# EAGLE board hub (EAGLE 7.1.0)
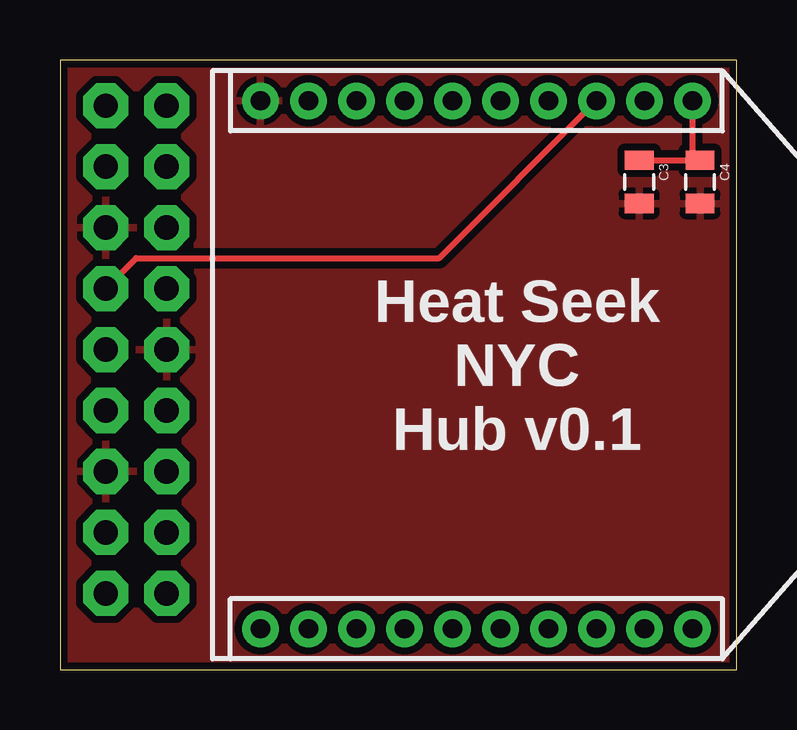
[diagram p0: board, top side]
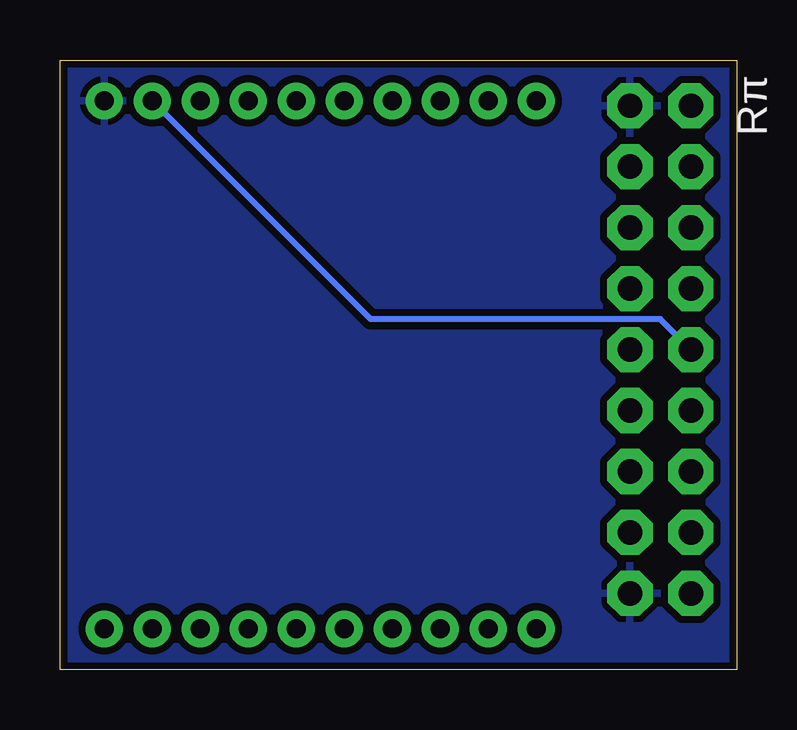
[diagram p1: board, bottom side, seen from below]

Size 28.19 x 25.4 mm. Coordinates in mm from the lower left corner, seen from the top.
Outline: 0,0 28.19,0 28.19,25.4 0,25.4 0,0
Copper layers (1*16): Top 0.035mm / dielectric 1.5mm / Bottom 0.035mm
Design rules "SparkFun-2-layer": minimum track width 7mil, minimum drill 15mil, track to track 8mil, track to pad 8mil, pad to pad 8mil, via to via 8mil, smd to smd 8mil, copper to edge 8mil, drill to drill 8mil, minimum pad ring 12mil, minimum via ring 10mil, stop-mask expansion 4mil, vias tented up to drill 20mil, thermal gap 10mil

## Footprints (pad centres in the part's own frame; a part is rotated, then mirrored left to right if it is on the bottom)
0805 = smd 0.8 x 1.2: 1 -0.9,0; 2 0.9,0
2X9_NOSILK = drill 1.016 pad 1.88 octagon: 1 -10.16,-1.27; 2 -10.16,1.27; 3 -7.62,-1.27; 4 -7.62,1.27; 5 -5.08,-1.27; 6 -5.08,1.27; 7 -2.54,-1.27; 8 -2.54,1.27; 9 0,-1.27; 10 0,1.27; 11 2.54,-1.27; 12 2.54,1.27; 13 5.08,-1.27; 14 5.08,1.27; 15 7.62,-1.27; 16 7.62,1.27; 17 10.16,-1.27; 18 10.16,1.27
XBEE-1 = drill 0.8 pad 1.524: 1 -11,20; 2 -11,18; 3 -11,16; 4 -11,14; 5 -11,12; 6 -11,10; 7 -11,8; 8 -11,6; 9 -11,4; 10 -11,2; 11 11,2; 12 11,4; 13 11,6; 14 11,8; 15 11,10; 16 11,12; 17 11,14; 18 11,16; 19 11,18; 20 11,20

## Placement (x,y rotation side)
C3  1µF  [0805]  24.13,20.32 270 top
C4  8.2pF  [0805]  26.67,20.32 270 top
FRAME1  FRAME-LETTER  [CREATIVE_COMMONS]  -6.35,36.83 0 top  (outside the outline)
Rπ  M9X2  [2X9_NOSILK]  3.17,13.34 270 bottom
XB24  XBEE-1XBEE-1  [XBEE-1]  6.35,12.7 270 top

## Library data of the parts
C3 C4 = SparkFun-Capacitors
FRAME1 = SparkFun-Aesthetics
Rπ XB24 = hrldcpr

## Nets
3.3V: C3.1 C4.1 Rπ.1 Rπ.17 XB24.1
GND: C3.2 C4.2 Rπ.6 Rπ.9 Rπ.14 XB24.10
N$1: Rπ.10 XB24.2
N$2: Rπ.8 XB24.3
VREF: XB24.14

## Tracks (layer width: path | path; a pad name or v marks a point on that pad's centre or on a via)
3.3V
  Top 0.254: C3.1 C4.1 26.35,21.22 XB24.1
  pour Bottom (isolate 0.305): 0,0 0,25.4 28.19,25.4 28.19,0
GND
  pour Top (isolate 0.305): 0,0 0,25.4 28.19,25.4 28.19,0
N$1
  Bottom 0.254: Rπ.10 3.17,14.61 15.26,14.61 XB24.2
N$2
  Top 0.254: Rπ.8 3.17,17.14 15.79,17.14 XB24.3

## Text on the board
tPlace: Heat Seek / NYC / Hub v0.1
tDocu: Harold Cooper